# Altium PCB PCB1.PcbDoc
Units mil, origin at the board's own origin, x right, y up, seen from the top; angles counter-clockwise.
Board outline 1700 x 1500 mil, 2 copper layers (Top Layer, Bottom Layer); 14 components, 11 nets, 39 pads, 3 vias.
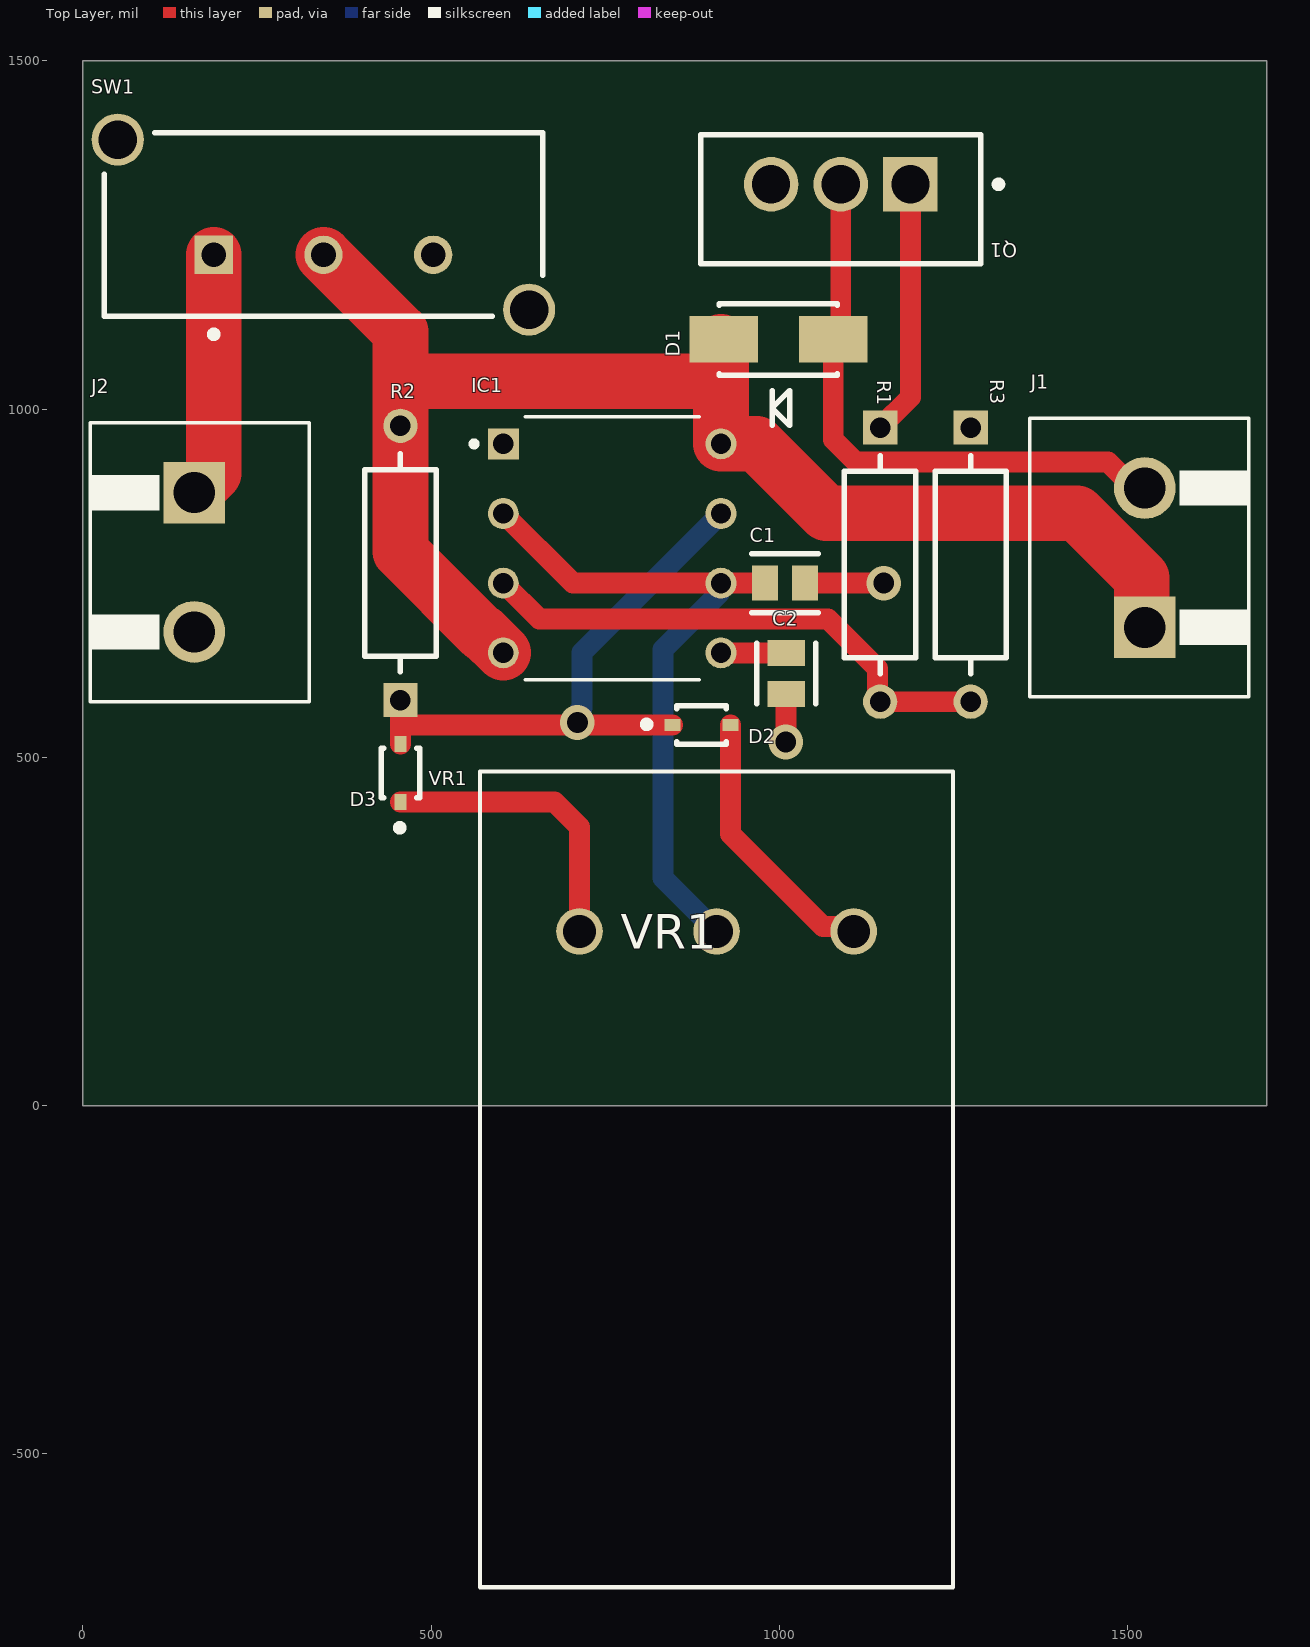
[diagram p0: Top Layer view]
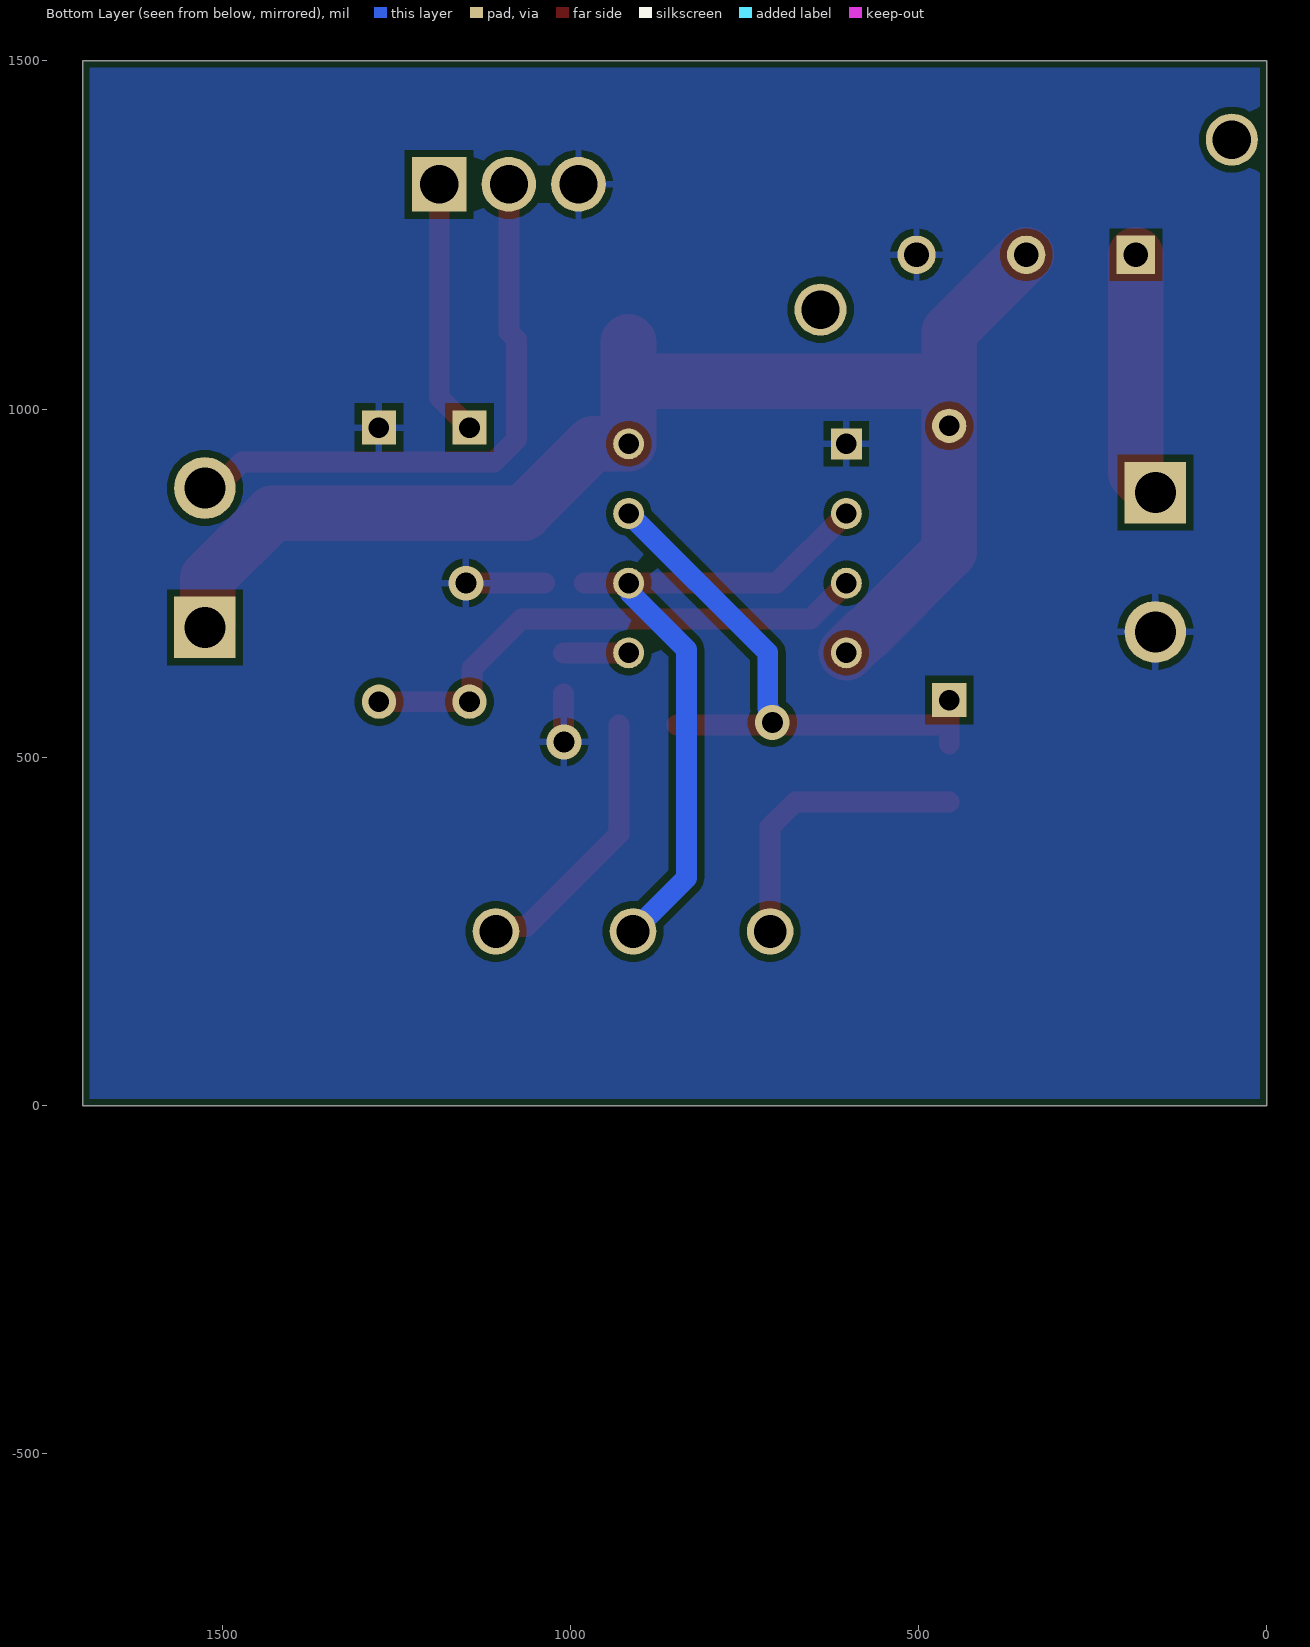
[diagram p1: Bottom Layer view, seen from below]
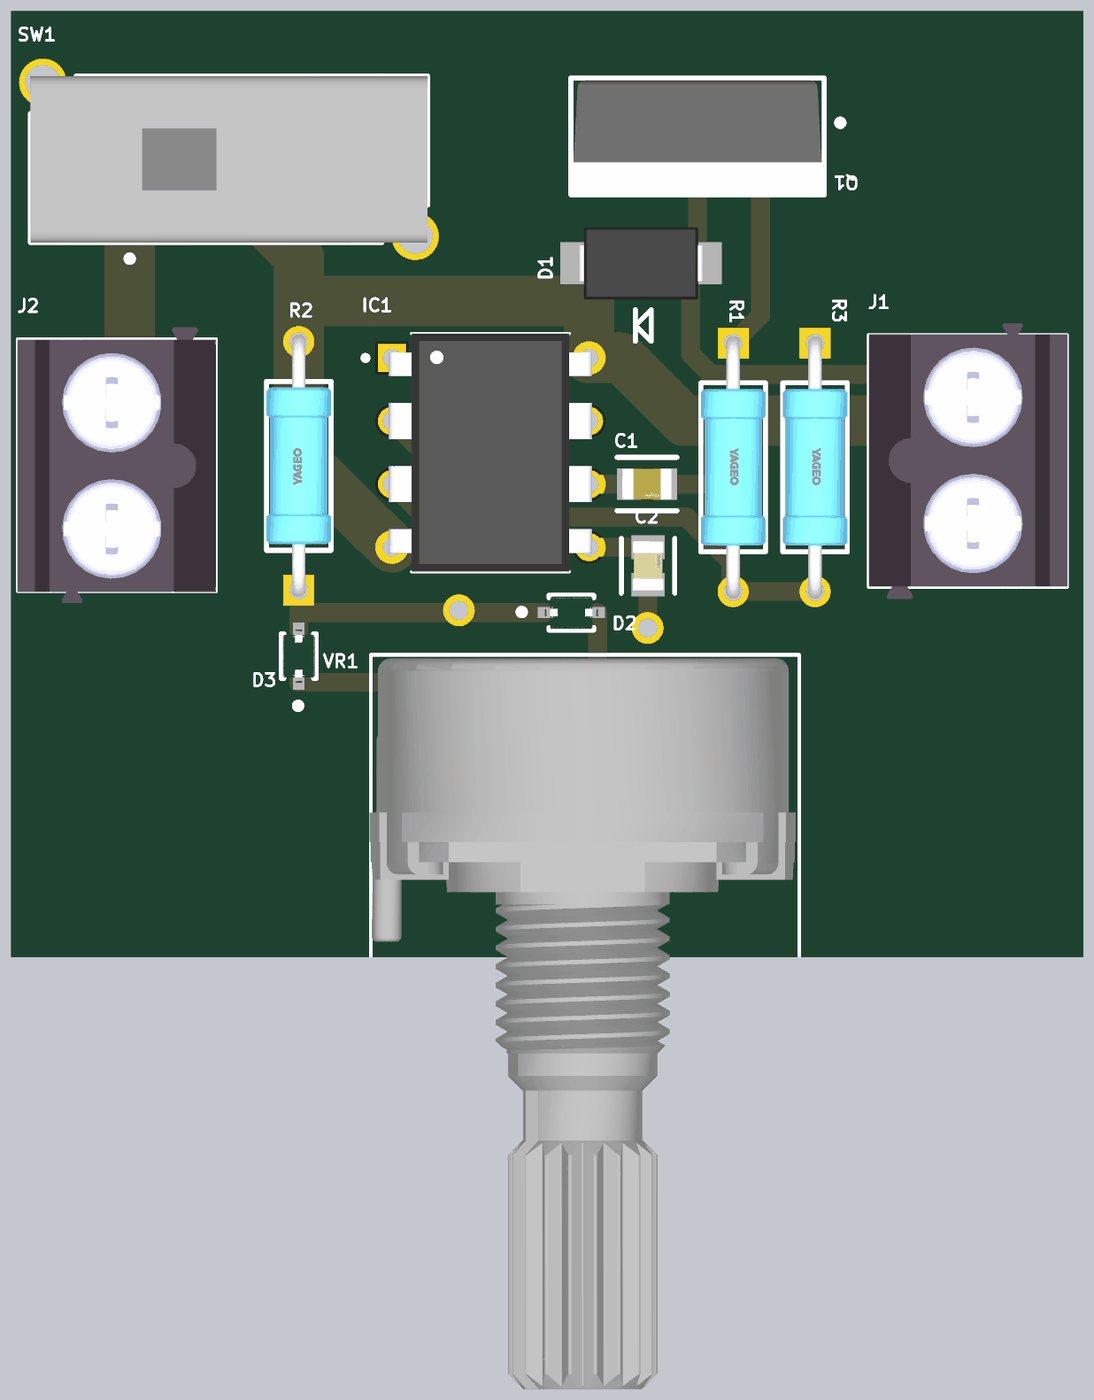
[diagram p2: 3D render of the assembled board from above, using the file's embedded part models]

## Layer stack, top to bottom
Top Solder: solder mask 0.4, Solder Resist, Dk 3.5
Top Layer: signal copper 1.4
Dielectric 1: dielectric 12.6, FR-4, Dk 4.8
Bottom Layer: signal copper 1.4
Bottom Solder: solder mask 0.4, Solder Resist, Dk 3.5

## Board outline
0,0 1700,0 1700,1500 0,1500

## Design rules (kind name [scope] priority, off if disabled: settings)
Clearance [All] p1: gap=10 ignorepadtopadclearanceinfootprint=FALSE
PolygonConnect [All] p1: connectstyle=Relief reliefconductorwidth=10 reliefentries=4 polygonreliefangle="90 Angle" airgapwidth=10
RoutingVias [All] p1: holewidth=30 width=50 viastyle="Through Hole" minholewidth=30 minwidth=50 maxholewidth=30 maxwidth=50
SolderMaskExpansion [All] p1: expansion=0 istentingtop=FALSE
SupplyNets "Schematic Supply Nets_1" [InNet('+12')] p1: voltage=0.000
SupplyNets "Schematic Supply Nets" [InNet('GND')] p2: voltage=0.000
Width [All] p1: maxlimit=100 minlimit=15 preferedwidth=80 minimp=50.000000 maximp=50.000000 favimp=50.000000
30 further rules are at their usual default settings.

## Components (designator, comment, footprint, x,y, rotation, side; value= is the part's Value field where it differs from the comment)
C1 "GRM2165C2A103JA01D" FP-GRM216-0_1-0_05-IPC_C 1008.22,750.17 r0 top
C2 "C0805C104K5RACAUTO" FP-C0805C-DN-MFG 1010,620.47 r270 top value="0.10 μF"
D1 "US1M-13-F" DIOD-SMA-2_A_V 998.74,1100 r180 top
D2 "1N4448WS-7-F" FP-SOD323-MFG 888.35,546.28 r0 top value=4pF
D3 "1N4448WS-7-F" FP-SOD323-MFG 456.03,477.5 r90 top value=4pF
IC1 "LM555CN/NOPB" DIP794W45P254L959H508Q8 760,800 r0 top
J1 "1760510000" 1760490000 1524.8,686.61 r90 top
J2 "1760510000" 1760490000 160,880 r270 top
Q1 "IRFZ44NPBF" IFX-PG-TO220-3-904-1 1088.31,1322.72 r180 top
R1 "MFR-25FBF52-1K18" FP-MFR-25-MFG 1144.8,776.61 r270 top value=1.18kΩ
R2 "MFR-25FBF52-1K18" FP-MFR-25-MFG 456.03,779 r90 top value=1.18kΩ
R3 "MFR-25FBF52-1K18" FP-MFR-25-MFG 1274.8,776.61 r270 top value=1.18kΩ
SW1 "1825255-1" TECO-1825255-1_V 345.49,1264.8 r0 top
VR1 "P160KN2-0QC20B100K" IC3_P160KN2-0QC20B100K_BIT 713.15,250 r0 top

## Footprints (in the part's own frame and the unit in brackets; to place one, negate y for a bottom-side part, rotate by r counter-clockwise, add the part's x,y. Pads: shape width x height; smd on the part's side, far side on the other; paste and mask are expansions set on the pad)
1760490000 [mm]
  rect 2.25x2.25 hole 1.5: 1(0,0)
  round 2.25 hole 1.5: 2(5.08,0)
  silkscreen extent -2.54,-3.81 7.62,4.2, body extent -3.02,-3.81 8.1,4.19, height 10.01
DIOD-SMA-2_A_V [mm] "SMA, 2-Leads, Body 4.3x2.605mm"
  rect 2.5x1.7 smd: 1(-2,0) 2(2,0)
  silkscreen extent -2.15,-1.3 2.15,3.14, body extent -2.52,-1.46 2.52,1.46, height 2.4
DIP794W45P254L959H508Q8 [mm]
  rect 1.13x1.13 / inner round 1.13 / far side rect 1.13x1.13 hole 0.74 mask+0.102: 1(-3.97,3.81)
  round 1.13 hole 0.74 mask+0.102: 2(-3.97,1.27) 3(-3.97,-1.27) 4(-3.97,-3.81) 5(3.97,-3.81) 6(3.97,-1.27) 7(3.97,1.27) 8(3.97,3.81)
  silkscreen extent -5.13,-4.8 3.17,4.8, body extent -4.1,-4.79 4.1,4.79, height 5.08
FP-C0805C-DN-MFG [mm]
  rect 0.95x1.35 smd paste+0 mask+0: 1(-0.75,0) 2(0.75,0)
  silkscreen extent -1.1,-1.07 1.1,1.07, body extent -1.4,-0.85 1.4,0.85, height 0.25
FP-GRM216-0_1-0_05-IPC_C [mil]
  rect 37.71x49.69 smd paste+0 mask+0: 1(-28.63,0) 2(28.63,0)
  silkscreen extent -47,-42 47,42, body extent -51,-31 51,31, height 10
FP-MFR-25-MFG [mm]
  rect 1.25x1.25 hole 0.75 paste-2539.97 mask+0: 1(-5,0)
  round 1.25 hole 0.75 paste-2539.97 mask+0: 2(5,0)
  silkscreen extent -3.98,-1.3 3.97,1.3, body extent -5.72,-1.4 5.72,1.4, height 0.25
FP-SOD323-MFG [mm]
  rect 0.59x0.45 smd paste+0 mask+0: 1(-1.055,0) 2(1.055,0)
  silkscreen extent -2.12,-0.7 0.9,0.7, body extent -1.45,-0.8 1.45,0.8, height 0.25
IC3_P160KN2-0QC20B100K_BIT [mil]
  round 67 hole 47 paste-99999 mask+0: 1(0,0) 2(196.85,0) 3(393.7,0)
  silkscreen extent -143,-942 536,229, body extent -145,-934 531,224, height 1047
IFX-PG-TO220-3-904-1 [mm] "TO,flange mount,2.54 mm pitch, 3 pin, 10.16 mm L X 4.57 mm W X 20.56 mm H body"
  rect 1.99x1.99 hole 1.39 paste-2539.97 mask+0: 1(-2.54,0)
  round 1.99 hole 1.39 paste-2539.97 mask+0: 2(0,0) 3(2.54,0)
  silkscreen extent -5.87,-1.8 5.1,2.9, body extent -5.16,-1.72 5.16,2.86, height 19.84
TECO-1825255-1_V [mm] "THD, 5-Leads, Body 6.7x16mm, Pitch 4mm"
  rect 1.4x1.4 hole 0.9: 1(-4,-1.1)
  round 1.4 hole 0.9: 2(0,-1.1) 3(4,-1.1)
  round 1.9 hole 1.4: MH1(-7.5,3.1) MH2(7.5,-3.1)
  silkscreen extent -8,-4.12 8,3.35, body extent -8,-3.35 8,3.35, height 12

## Part data
C1: library part CMP-06035-017805-1, "Chip Multilayer Ceramic Capacitors for General Purpose, 0805, 10000pF, C0G, 30ppm/°C, 5%, 100V"
C2: library part CMP-2007-00278-2, "CAP CER 0.1UF 50V X7R 0805", Capacitance="0.10 μF", Manufacturer=KEMET, Package=C0805C-DN, Temperature="-55°C to +125°C", Temperature Characteristic=X7R, Temperature Coefficient=30ppm/°C, Temperature Range High=+125°C, Temperature Range Low=-55°C, Tolerance=0.1, Voltage Rating="50 V", Automotive=No, Category=Cap, ComponentLink2Description=Datasheet, ComponentLink2URL=https://content.kemet.com/datasheets/KEM_C1003_C0G_SMD.pdf, Device Class L1="Passive Components", Device Class L2=Capacitors, Device Class L3="Ceramic Capacitors", Digikey Description="CAP CER 0.1UF 50V X7R 0805", Height=0.88mm, Ipc Land Pattern Name=CAPC200125X78, Lead Free=Yes, Manufacturer Part Number=C0805C104K5RACAUTO, Material=Ceramic, Mouser Description="Multilayer Ceramic Capacitors MLCC - SMD/SMT 0.1uF 50volts 10% AUTO", Octopart=https://octopart.com/c0805c104k5racauto-kemet-12625097, RoHS=TRUE
D1: library part CMP-2000-07364-1, "Ultra-Fast Rectifier, 1 A, 1.7 V, -65 to 150 degC, 2-Pin SMA, RoHS, Tape and Reel", Average Rectified Current-Max=1A, Forward Voltage=1.7V, Manufacturer="Diodes Inc", Package Description="2-Pin Surface Mount Device, Body 4.3 x 2.605 mm", Package Reference=SMA-2, Reverse Current-Max=5µA, Reverse Voltage-Max [Vrrm]=1000V, Datasheet URL=http://www.diodes.com/_files/datasheets/ds16008.pdf, Datasheet Version="Rev. 11-2, 12/2014", Manufacturer URL=http://www.diodes.com/, Mounting Technology=SurfaceMount, Reverse Recovery Time-Max=75ns
D2 D3: library part CMP-12791-000011-1, "DIODE GEN PURP 75V 250MA SOD323", Capacitance=4pF, Forward Current=500mA, Manufacturer="Diodes Incorporated", Max Junction Temp=+150°C, Max Repetitive Reverse Voltage=75V, Max Surge Forward Current=0.5A, Package=SOD323, Peak Reverse Current=2.5uA, Temperature="-65°C to +150°C", Temperature Range Low=-65°C, Automotive=No, Category=Diode, ComponentLink2Description=Datasheet, ComponentLink2URL=https://www.diodes.com/assets/Datasheets/ds30096.pdf, Device Class L1="Discrete Semiconductors", Device Class L2=Diodes, Device Class L3="Rectifier Diodes", Digikey Description="DIODE GEN PURP 75V 250MA SOD323", Footprint Url=https://www.diodes.com/assets/Package-Files/SOD323.pdf, Height=1.2mm, Lead Free=Yes, Manufacturer Part Number=1N4448WS-7-F, Mouser Description="1N4448WS Series 4 A 75 V 200 mW Surface Mount Fast Switching Diode - SOD-323", Octopart=https://octopart.com/1n4448ws-7-f-diodes+inc.-55389585, Reverse Voltage=75V, RoHS=TRUE, Standoff Height=0.05mm, Temperature Range High=+150°C
IC1: "IC OSC SINGLE TIMER 100KHZ 8-DIP \"555 Type, Timer/Oscillator (Single) IC 100kHz 8-PDIP\"", Ambient Temperature Range High=70°C, Case/Package=PDIP, Current Rating=200A, Frequency=100kHz, High Level Output Current=-200mA, Low Level Output Current=200mA, Manufacturer="Texas Instruments", Manufacturer Lifecycle Status=ACTIVE, Manufacturer Package Identifier=P(R-PDIP--T8), Max Power Dissipation=1.18W, Max Supply Voltage=16V, Min Operating Temperature=0°C, Min Supply Voltage=4.5V, Nominal Supply Current=3mA, Operating Supply Current=10mA, Supplier Part Number=LM555CNNS/NOPB-ND, Category="Timers and Oscillators", ComponentLink1Description=https://datasheet.octopart.com:443/LM555CN-NOPB-Texas-Instruments-datasheet-39144970.pdf?src-supplier=Texas+Instruments, ComponentLink1URL=https://datasheet.octopart.com:443/LM555CN-NOPB-Texas-Instruments-datasheet-39144970.pdf?src-supplier=Texas+Instruments, ComponentLink2Description=https://octopart.com:443/opatz8j6/c1?t=P9WJEuKpBNBQUNyDZTk4jrYEfZFxStfoFvCVy4zyfSvKfndzEk-HPsDKw6nWdCdN9BYUaBjSdlQxEtgzEOfQqYUxHZYj0MFD8BtoaQrN98rnk2ABdG3YuZhLly47aMb-yaBTjmH8iFOuBqfgHeCopvmqO6b-ug0lSNuacah300as_CwAluqpEy1P2MViceMlsYzHsM9V1fQEl8JIDwZG2ZgHryeoS_IuIWkEYb_ITxG-U4GmwsjED24hNxdr2L48pBClFoDw3YQ6sf9XlTKElbntYCe9Aii69H1ldAWBsiBXhMao6Z7iZVKXgozQ22O6PEKqYt-Glnfpjj9J-wCJ3UiYSu5f960Oh5TKe5VDlb3wh5lyrbEOZ0rU9g9jU7Nr7Xmz&src-supplier=Texas+Instruments, ComponentLink2URL=https://octopart.com:443/opatz8j6/c1?t=P9WJEuKpBNBQUNyDZTk4jrYEfZFxStfoFvCVy4zyfSvKfndzEk-HPsDKw6nWdCdN9BYUaBjSdlQxEtgzEOfQqYUxHZYj0MFD8BtoaQrN98rnk2ABdG3YuZhLly47aMb-yaBTjmH8iFOuBqfgHeCopvmqO6b-ug0lSNuacah300as_CwAluqpEy1P2MViceMlsYzHsM9V1fQEl8JIDwZG2ZgHryeoS_IuIWkEYb_ITxG-U4GmwsjED24hNxdr2L48pBClFoDw3YQ6sf9XlTKElbntYCe9Aii69H1ldAWBsiBXhMao6Z7iZVKXgozQ22O6PEKqYt-Glnfpjj9J-wCJ3UiYSu5f960Oh5TKe5VDlb3wh5lyrbEOZ0rU9g9jU7Nr7Xmz&src-supplier=Texas+Instruments, ComponentLink3Description=https://datasheet.octopart.com:443/LM555CN-NOPB-Texas-Instruments-datasheet-36834611.pdf?src-supplier=Texas+Instruments, ComponentLink3URL=https://datasheet.octopart.com:443/LM555CN-NOPB-Texas-Instruments-datasheet-36834611.pdf?src-supplier=Texas+Instruments, ComponentLink4Description=https://datasheet.octopart.com:443/LM555CN-NOPB-Texas-Instruments-datasheet-14540375.pdf?src-supplier=Texas+Instruments, ComponentLink4URL=https://datasheet.octopart.com:443/LM555CN-NOPB-Texas-Instruments-datasheet-14540375.pdf?src-supplier=Texas+Instruments, ComponentLink5Description=https://sigma.octopart.com:443/49250158/technical_drawing/Texas-Instruments-LM555CN-NOPB.pdf?src-supplier=Texas+Instruments, ComponentLink5URL=https://sigma.octopart.com:443/49250158/technical_drawing/Texas-Instruments-LM555CN-NOPB.pdf?src-supplier=Texas+Instruments, ComponentLink6Description=https://datasheet.octopart.com:443/LM555CN/NOPB-Texas-Instruments-datasheet-10617826.pdf?src-supplier=element14, ComponentLink6URL=https://datasheet.octopart.com:443/LM555CN/NOPB-Texas-Instruments-datasheet-10617826.pdf?src-supplier=element14, ComponentLink7Description=https://datasheet.octopart.com:443/LM555CN-NOPB-Texas-Instruments-datasheet-34116.pdf?src-supplier=element14, ComponentLink7URL=https://datasheet.octopart.com:443/LM555CN-NOPB-Texas-Instruments-datasheet-34116.pdf?src-supplier=element14, ComponentLink8Description=https://datasheet.octopart.com:443/LM555CN-NOPB-Texas-Instruments-datasheet-62346024.pdf?src-supplier=Farnell, ComponentLink8URL=https://datasheet.octopart.com:443/LM555CN-NOPB-Texas-Instruments-datasheet-62346024.pdf?src-supplier=Farnell, ComponentLink9Description=https://datasheet.octopart.com:443/LM555CN-NOPB-Texas-Instruments-datasheet-27844323.pdf?src-supplier=Farnell, ComponentLink9URL=https://datasheet.octopart.com:443/LM555CN-NOPB-Texas-Instruments-datasheet-27844323.pdf?src-supplier=Farnell, ComponentLink10Description=https://datasheet.octopart.com:443/LM555CN-NOPB-Texas-Instruments-datasheet-24897031.pdf?src-supplier=Farnell, ComponentLink10URL=https://datasheet.octopart.com:443/LM555CN-NOPB-Texas-Instruments-datasheet-24897031.pdf?src-supplier=Farnell, ComponentLink11Description=https://datasheet.octopart.com:443/LM555CN-NOPB-Texas-Instruments-datasheet-21076736.pdf?src-supplier=element14+APAC, ComponentLink11URL=https://datasheet.octopart.com:443/LM555CN-NOPB-Texas-Instruments-datasheet-21076736.pdf?src-supplier=element14+APAC, ComponentLink12Description=https://datasheet.octopart.com:443/LM555CN-NOPB-Texas-Instruments-datasheet-164415203.pdf?src-supplier=SHENGYU+ELECTRONICS, ComponentLink12URL=https://datasheet.octopart.com:443/LM555CN-NOPB-Texas-Instruments-datasheet-164415203.pdf?src-supplier=SHENGYU+ELECTRONICS, ComponentLink13Description=https://datasheet.octopart.com:443/LM555CN-NOPB-Texas-Instruments-datasheet-38190905.pdf?src-supplier=Newark, ComponentLink13URL=https://datasheet.octopart.com:443/LM555CN-NOPB-Texas-Instruments-datasheet-38190905.pdf?src-supplier=Newark, ComponentLink14Description=https://datasheet.octopart.com:443/LM555CN/NOPB-National-Semiconductor-datasheet-14043549.pdf?src-supplier=iiiC, ComponentLink14URL=https://datasheet.octopart.com:443/LM555CN/NOPB-National-Semiconductor-datasheet-14043549.pdf?src-supplier=iiiC, ComponentLink15Description=https://datasheet.octopart.com:443/LM555CN/NOPB-National-Semiconductor-datasheet-7281965.pdf?src-supplier=Jameco+(USA), ComponentLink15URL=https://datasheet.octopart.com:443/LM555CN/NOPB-National-Semiconductor-datasheet-7281965.pdf?src-supplier=Jameco+(USA), ComponentLink16Description=http://sigma.octopart.com:80/reach_statement/Texas-Instruments-company-64.pdf?src-supplier=Compliance+Statements, ComponentLink16URL=http://sigma.octopart.com:80/reach_statement/Texas-Instruments-company-64.pdf?src-supplier=Compliance+Statements, ComponentLink17Description=http://sigma.octopart.com:80/conflict_mineral_statement/Texas-Instruments-company-63.pdf?src-supplier=Compliance+Statements, ComponentLink17URL=http://sigma.octopart.com:80/conflict_mineral_statement/Texas-Instruments-company-63.pdf?src-supplier=Compliance+Statements, Contact Plating=Tin, Height=5.08mm, Lead Free="Lead Free", Length=9.81mm, Lifecycle Status=Production, Manufacturer Part Number=LM555CN/NOPB, Max Junction Temperature (Tj)=70°C, Max Operating Temperature=70°C, Mount="Through Hole", Number of Channels=1, Number of Pins=8, Number of Timers/Counters=1, Output Current=200mA, Power Dissipation=1.18W, Pricing="1=1.44, 10=1.045, 40=0.90625, 120=0.82858, 280=0.78304, 520=0.75596, 1000=0.73206, 2520=0.70495, 5000=0.68894 (USD)", Quiescent Current=3mA, Radiation Hardening=No, REACH SVHC=Unaffected, RoHS=Compliant, Schedule B="8542390000, 8542390000|8542390000|8542390000|8542390000|8542390000|8542390000|8542390000|8542390000|8542390000|8542390000|8542390000|8542390000|8542390000|8542390000|8542390000|8542390000|8542390000|8542390000|8542390000|8542390000|8542390000|8542390000|8542390000|85", Stock=14598, Supplier=DigiKey, Thickness=3.9mm, Weight=4.535924g, Width=6.35mm
J1 J2: "Weidmuller PCB Terminal Block PM Series, 2-Ch, 5.08mm Pitch, TH, Screw Termination, Black", Color=Black, Current=15A, Flammability Rating="UL94 V-0", Manufacturer=Weidmuller, Max Current Rating=16A, Max Operating Temperature=120°C, Max Supply Voltage=300V, Min Operating Temperature=-50°C, Supplier Part Number=281-1882-ND, Approvals="CSA, IEC, UL, VDE, cUL", Category="Terminal Blocks", ComponentLink1Description=https://datasheet.octopart.com:443/1760510000-Weidmuller-datasheet-181506134.pdf?src-supplier=IHS, ComponentLink1URL=https://datasheet.octopart.com:443/1760510000-Weidmuller-datasheet-181506134.pdf?src-supplier=IHS, ComponentLink2Description=https://datasheet.octopart.com:443/1760510000-Weidmuller-datasheet-83001070.pdf?src-supplier=Master+Electronics, ComponentLink2URL=https://datasheet.octopart.com:443/1760510000-Weidmuller-datasheet-83001070.pdf?src-supplier=Master+Electronics, ComponentLink3Description=https://datasheet.octopart.com:443/1760510000-Weidmuller-datasheet-154819650.pdf?src-supplier=Electro+Sonic, ComponentLink3URL=https://datasheet.octopart.com:443/1760510000-Weidmuller-datasheet-154819650.pdf?src-supplier=Electro+Sonic, ComponentLink4Description=https://datasheet.octopart.com:443/1760510000-Weidmuller-datasheet-42752043.pdf?src-supplier=Electro+Sonic, ComponentLink4URL=https://datasheet.octopart.com:443/1760510000-Weidmuller-datasheet-42752043.pdf?src-supplier=Electro+Sonic, ComponentLink5Description=https://datasheet.octopart.com:443/1760510000-Weidmuller-datasheet-41486043.pdf?src-supplier=element14+APAC, ComponentLink5URL=https://datasheet.octopart.com:443/1760510000-Weidmuller-datasheet-41486043.pdf?src-supplier=element14+APAC, ComponentLink6Description=https://datasheet.octopart.com:443/1760510000-Weidmuller-datasheet-177944115.pdf?src-supplier=Burklin+Elektronik, ComponentLink6URL=https://datasheet.octopart.com:443/1760510000-Weidmuller-datasheet-177944115.pdf?src-supplier=Burklin+Elektronik, ComponentLink7Description=https://datasheet.octopart.com:443/1760510000-Weidmuller-datasheet-21274839.pdf?src-supplier=Newark, ComponentLink7URL=https://datasheet.octopart.com:443/1760510000-Weidmuller-datasheet-21274839.pdf?src-supplier=Newark, ComponentLink8Description=https://datasheet.octopart.com:443/1760510000-Weidmuller-datasheet-8814545.pdf?src-supplier=element14, ComponentLink8URL=https://datasheet.octopart.com:443/1760510000-Weidmuller-datasheet-8814545.pdf?src-supplier=element14, Connector Type="PCB, Terminal Block", Contact Material="Nickel, Tin", Contact Plating=Tin, Country of Origin="Mainland China", Current Rating=15A, Depth=8mm, Export Control Classification Number (ECCN) Code=EAR99, Harmonized Tariff Schedule (HTS) Code=8536.90.40.00, Height=10mm, Housing Color=Black, Introduction Date=2001-05-15, Lead Free="Contains Lead", Length=11.2mm, Lifecycle Status=Production, Manufacturer Part Number=1760510000, Mount=Solder, Number of Circuits=2, Number of Contacts=2, Number of Levels=1, Number of Pins=2, Number of Positions=2, Number of Positions Per Level=2, Number of Rows=1, Orientation=Straight, Pitch=5.08mm, Pricing="1=0.8, 10=0.592, 25=0.516, 50=0.465, 100=0.4205, 250=0.37204, 500=0.34274, 1000=0.31901, 5000=0.28104 (USD)", Radiation Hardening=No, REACH SVHC=Affected, RoHS=Compliant, Stock=31277, Supplier=DigiKey, Termination=Solder, Voltage=300V, Voltage Rating=300V, Width=8mm, Wire Gauge (Max)=26AWG, Wire Gauge (Min)=14AWG, Wire/Cable Gauge=14AWG
Q1: "MOSFET, Power; N-Ch; VDSS 55V; RDS(ON) 17.5 Milliohms; ID 49A; TO-220AB; PD 94W; -55deg", Case/Package=TO-220AB, Continuous Drain Current (ID)=49A, Drain to Source Breakdown Voltage=55V, Drain to Source Resistance=17.5mΩ, Gate to Source Voltage (Vgs)=20V, Input Capacitance=1.47nF, Manufacturer=Infineon, Max Junction Temperature (Tj)=175°C, Max Power Dissipation=94W, Min Operating Temperature=-55°C, Package Quantity=1000, Power Dissipation=83W, Resistance=17.5MΩ, Supplier Part Number=IRFZ44NPBF-ND, Threshold Voltage=2.1V, Category=MOSFETs, ComponentLink1Description=https://datasheet.octopart.com:443/IRFZ44NPBF-Infineon-datasheet-10898344.pdf?src-supplier=IHS, ComponentLink1URL=https://datasheet.octopart.com:443/IRFZ44NPBF-Infineon-datasheet-10898344.pdf?src-supplier=IHS, ComponentLink2Description=https://datasheet.octopart.com:443/IRFZ44NPBF-Infineon-datasheet-180070255.pdf?src-supplier=element14+APAC, ComponentLink2URL=https://datasheet.octopart.com:443/IRFZ44NPBF-Infineon-datasheet-180070255.pdf?src-supplier=element14+APAC, ComponentLink3Description=https://datasheet.octopart.com:443/IRFZ44NPBF-Infineon-datasheet-163297.pdf?src-supplier=Farnell, ComponentLink3URL=https://datasheet.octopart.com:443/IRFZ44NPBF-Infineon-datasheet-163297.pdf?src-supplier=Farnell, ComponentLink4Description=https://datasheet.octopart.com/IRFZ44NPBF-Infineon-datasheet-7575919.pdf, ComponentLink4URL=https://datasheet.octopart.com/IRFZ44NPBF-Infineon-datasheet-7575919.pdf, ComponentLink5Description=https://datasheet.octopart.com:443/IRFZ44N-International-Rectifier-datasheet-82086.pdf?src-supplier=Newark, ComponentLink5URL=https://datasheet.octopart.com:443/IRFZ44N-International-Rectifier-datasheet-82086.pdf?src-supplier=Newark, ComponentLink6Description=https://datasheet.octopart.com:443/IRFZ44NPBF-International-Rectifier-datasheet-7564879.pdf?src-supplier=_legacy+Avnet, ComponentLink6URL=https://datasheet.octopart.com:443/IRFZ44NPBF-International-Rectifier-datasheet-7564879.pdf?src-supplier=_legacy+Avnet, ComponentLink7Description=https://datasheet.octopart.com:443/IRFZ44NPBF-International-Rectifier-datasheet-14061588.pdf?src-supplier=iiiC, ComponentLink7URL=https://datasheet.octopart.com:443/IRFZ44NPBF-International-Rectifier-datasheet-14061588.pdf?src-supplier=iiiC, ComponentLink8Description=https://datasheet.octopart.com:443/IRFZ44N-International-Rectifier-datasheet-10733621.pdf?src-supplier=iiiC, ComponentLink8URL=https://datasheet.octopart.com:443/IRFZ44N-International-Rectifier-datasheet-10733621.pdf?src-supplier=iiiC, ComponentLink9Description=https://datasheet.octopart.com:443/IRFZ44NPBF-Infineon-datasheet-9874387.pdf?src-supplier=RS+(Formerly+Allied+Electronics), ComponentLink9URL=https://datasheet.octopart.com:443/IRFZ44NPBF-Infineon-datasheet-9874387.pdf?src-supplier=RS+(Formerly+Allied+Electronics), ComponentLink10Description=https://datasheet.octopart.com:443/IRFZ44N-International-Rectifier-datasheet-58767.pdf?src-supplier=RS+(Formerly+Allied+Electronics), ComponentLink10URL=https://datasheet.octopart.com:443/IRFZ44N-International-Rectifier-datasheet-58767.pdf?src-supplier=RS+(Formerly+Allied+Electronics), ComponentLink11Description=https://datasheet.octopart.com:443/IRFZ44NPBF-Infineon-datasheet-7280676.pdf?src-supplier=Jameco+(USA), ComponentLink11URL=https://datasheet.octopart.com:443/IRFZ44NPBF-Infineon-datasheet-7280676.pdf?src-supplier=Jameco+(USA), ComponentLink12Description=https://datasheet.octopart.com:443/IRFZ44NPBF-International-Rectifier-datasheet-92204.pdf?src-supplier=DigiKey, ComponentLink12URL=https://datasheet.octopart.com:443/IRFZ44NPBF-International-Rectifier-datasheet-92204.pdf?src-supplier=DigiKey, ComponentLink13Description=http://sigma.octopart.com:80/conflict_mineral_statement/Infineon-company-51.pdf?src-supplier=Compliance+Statements, ComponentLink13URL=http://sigma.octopart.com:80/conflict_mineral_statement/Infineon-company-51.pdf?src-supplier=Compliance+Statements, ComponentLink14Description=http://sigma.octopart.com:80/reach_statement/International-Rectifier-company-55.pdf?src-supplier=Compliance+Statements, ComponentLink14URL=http://sigma.octopart.com:80/reach_statement/International-Rectifier-company-55.pdf?src-supplier=Compliance+Statements, ComponentLink15Description=http://sigma.octopart.com:80/rohs_statement/International-Rectifier-company-54.pdf?src-supplier=Compliance+Statements, ComponentLink15URL=http://sigma.octopart.com:80/rohs_statement/International-Rectifier-company-54.pdf?src-supplier=Compliance+Statements, Contact Plating=Tin, Country of Origin="Mainland China, Mexico", Current Rating=49A, Drain to Source Voltage (Vds)=55V, Dual Supply Voltage=55V, Element Configuration=Single, Export Control Classification Number (ECCN) Code=EAR99, Fall Time=45ns, Harmonized Tariff Schedule (HTS) Code=8541.29.00.95, Height=8.77mm, Introduction Date=2003-10-31, Lead Free="Lead Free", Lead Pitch=2.54mm, Length=10.668mm, Lifecycle Status=Production, Manufacturer Part Number=IRFZ44NPBF, Max Operating Temperature=175°C, Min Breakdown Voltage=55V, Mount="Through Hole", Nominal Vgs=2.1V, Number of Elements=1, Number of Pins=3, Number of Terminals=3, On-State Resistance=17.5mΩ, Packaging=Bulk, Pricing="1=1.44, 10=0.907, 50=0.6742, 100=0.5987, 500=0.46614 (USD)", Radiation Hardening=No, Rds On Max=17.5mΩ, REACH SVHC=Unaffected, Recovery Time=95ns, Rise Time=60ns, RoHS=Compliant, Schedule B="8541290080, 8541290080|8541290080, 8541290080|8541290080|8541290080, 8541290080|8541290080|8541290080|8541290080", Stock=6269, Supplier=DigiKey, Termination="Through Hole", Turn-Off Delay Time=44ns, Turn-On Delay Time=12ns, Voltage Rating (DC)=55V, Width=4.826mm
R1 R2 R3: library part CMP-03413-000001-1, "RES 1.18K OHM 1/4W 1% AXIAL", Manufacturer=Yageo, Package=MFR-25, Power Rating=0.25W, Resistance=1.18kΩ, Temperature="-55°C to +155°C", Temperature Coefficient=100ppm/°C, Temperature Range High=+155°C, Temperature Range Low=-55°C, Tolerance=1%, Voltage Rating=250V, Automotive=No, Category=Res, ComponentLink2Description=Datasheet, ComponentLink2URL=https://www.yageo.com/upload/media/product/products/datasheet/lr/Yageo_LR_MFR_1.pdf, Composition="Metal Film", Device Class L1="Passive Components", Device Class L2=Resistors, Device Class L3="Through-Hole Resistors", Digikey Description="RES 1.18K OHM 1/4W 1% AXIAL", Height=2.6mm, Ipc Land Pattern Name=RESAD1000W75L680D260, Lead Free=Yes, Manufacturer Part Number=MFR-25FBF52-1K18, Mouser Description="Metal Film Resistors 1.18K OHM 1/4W 1%", Octopart=https://octopart.com/mfr-25fbf52-1k18-yageo-56251681, RoHS=TRUE, Series=MFR
SW1: library part CMP-2100-03576-1, "Slide Switch, SPDT, 125 V, -20 to 85 degC, 5-Pin THD, RoHS, Tray", Case/Package=300, Current Rating=300mA, Flammability Rating=UL94HB, Manufacturer="TE Connectivity", Max Operating Temperature=85degC, Max Voltage Rating (AC)=125V, Min Operating Temperature=-20degC, Operating Force=600gf, Package Description="5-Pin Through Hole Device, Body 6.7 x 16 mm, Pitch 4 mm", Package Quantity=560, Actuator Length=4.5mm, Contact Material=Copper, Contact Plating=Silver, Contact Style=Shorting, Datasheet URL=http://www.te.com/commerce/DocumentDelivery/DDEController?Action=showdoc&DocId=Customer+Drawing%7F1825255%7FA4%7Fpdf%7FEnglish%7FENG_CD_1825255_A4_baseFilename.pdf%7F1825255-1, Datasheet Version="Rev. A4, 03/2014", Depth=6.7mm, Electrical Life=15000Cycles, ELV=Compliant, Lead Free=LeadFree, Length=16mm, Manufacturer URL=http://www.te.com/, Max Current Rating=300mA, Mount=ThroughHole, Number of Positions=2, Orientation=Vertical, Package Reference=1825255-1, Packaging=Bulk, Radiation Hardening=No, REACH SVHC=Unknown, RoHSCompliant=true, Switch Travel=4mm, Termination=PCPins, Throw Configuration=SPDT, Voltage Rating (AC)=125V
VR1: "Potentiometer, Conductive Plastic, 0.2W, 100000ohm, 20% +/-Tol, 1 Turn(s)", Manufacturer="TT Electronics", Max Operating Temperature=70°C, Min Operating Temperature=-20°C, Power Rating=200mW, Resistance=100kΩ, Supplier Part Number=858-P160KN20C20B100K, Tolerance=20%, Category="Variable Resistors and Potentiometers", ComponentLink1Description=https://datasheet.octopart.com:443/P160KN2-0QC20B100K-BI-Technologies-datasheet-154728231.pdf?src-supplier=IHS, ComponentLink1URL=https://datasheet.octopart.com:443/P160KN2-0QC20B100K-BI-Technologies-datasheet-154728231.pdf?src-supplier=IHS, ComponentLink2Description=https://datasheet.octopart.com:443/P160KN2-0QC20B100K-BI-Technologies-datasheet-8329726.pdf?src-supplier=Sager+Electronics, ComponentLink2URL=https://datasheet.octopart.com:443/P160KN2-0QC20B100K-BI-Technologies-datasheet-8329726.pdf?src-supplier=Sager+Electronics, Composition="Conductive Plastic", Diameter=16.5mm, Length=9.5mm, Lifecycle Status=Production, Manufacturer Part Number=P160KN2-0QC20B100K, Number of Terminals=3, Number of Turns=1, Pricing="1=2.07, 10=1.67, 50=1.53, 100=1.34, 1000=1.05, 10000=0.868 (USD)", REACH SVHC=Affected, RoHS=Compliant, Stock=4009, Supplier=Mouser

## Via types
v1: diameter 50, hole 30, Top Layer to Bottom Layer, 3 vias

## Nets (pads, with @x,y where several pads share a name; then routed paths per layer and width w, separated by ;. In a path a pad name is that pad's centre, name@x,y a point inside that pad or via, vN(x,y) a via of type N, cw(c..) or ccw(c..) an arc to the next point about the centre after c; other vN are vias at no path point)
+12: D1.2 IC1.4 IC1.8 J1.1 R2.2 SW1.2 | length 2044.4
  Top Layer w80: SW1.2 456.03,1110.96 456.03,1043.4 ; IC1.4 575.94,677.76 573.78,677.76 456.03,795.5 R2.2 456.03,1043.4 ; IC1.8 967.75,950 1067.31,850.44 1427.62,850.44 1520.51,757.55 1520.51,690.9 J1.1 ; IC1.8@916.36,950.06 916.36,1040 ; D1.2@916.36,1096.36 916.36,1040 ; 456.03,1043.4 459.43,1040 916.36,1040
GND: C1.2 C2.2 IC1.1 J2.2 Q1.3 R3.1 SW1.3 | length 182.4
  Top Layer w30: v1(1009.25,522.04) 1009.63,522.42 1009.63,590.57 C2.2 ; C1.2 1036.94,750.09 1149.91,750.09 v1(1150,750)
NetC1_1: C1.1 IC1.2 IC1.6 VR1.2 | length 983.7
  Top Layer w30: IC1.2 703.7,750 850,750 IC1.6 916.39,750.09 979.51,750.09 C1.1
  Bottom Layer w30: VR1.2 833.1,326.9 833.1,654.64 913.53,735.06 913.53,747.23 IC1.6
NetC2_1: C2.1 IC1.5 | length 93.7
  Top Layer w30: IC1.5 C2.1
NetD1_1: D1.1 J1.2 Q1.2 | length 847.1
  Top Layer w30: Q1.2 1088.31,1110.83 D1.1 1077.48,956.21 1109.84,923.86 1471.7,923.86 1508.95,886.61 J1.2
NetD2_1: D2.1 D3.2 IC1.7 R2.1 | length 842
  Top Layer w30: D3.2 456.03,540 ; R2.1 456.03,540 ; D2.1 462.31,546.28 456.03,540
  Bottom Layer w30: v1(710,550) 713.83,553.83 713.83,567.97 716.53,570.68 716.53,650.23 IC1.7
NetD2_2: D2.2 VR1.3 | length 391.2
  Top Layer w30: D2.2 929.88,390.12 1062.92,257.08 1099.77,257.08 VR1.3
NetD3_1: D3.1 VR1.1 | length 421.9
  Top Layer w30: D3.1 677.04,435.96 713.15,399.85 VR1.1
NetIC1_3: IC1.3 R1.2 R3.2 | length 767.3
  Top Layer w30: IC1.3 655.41,698.29 1070.1,698.29 1141.13,627.27 1141.13,583.44 R1.2 R3.2
NetJ2_1: J2.1 SW1.1 | length 353.1
  Top Layer w80: J2.1 188.01,908.01 SW1.1
NetQ1_1: Q1.1 R1.1 | length 367.3
  Top Layer w30: R1.1 1188.31,1016.97 Q1.1
pads on no net: SW1.MH1 SW1.MH2

## Polygon pours and split planes (outlines as drawn)
GND on Bottom Layer "GND_L02_P000" (solid, pour order 0): 10,10 1690,10 1690,1490 10,1490